# EAGLE board sensor_node_inner_layer-Panel (EAGLE 9.6.0)
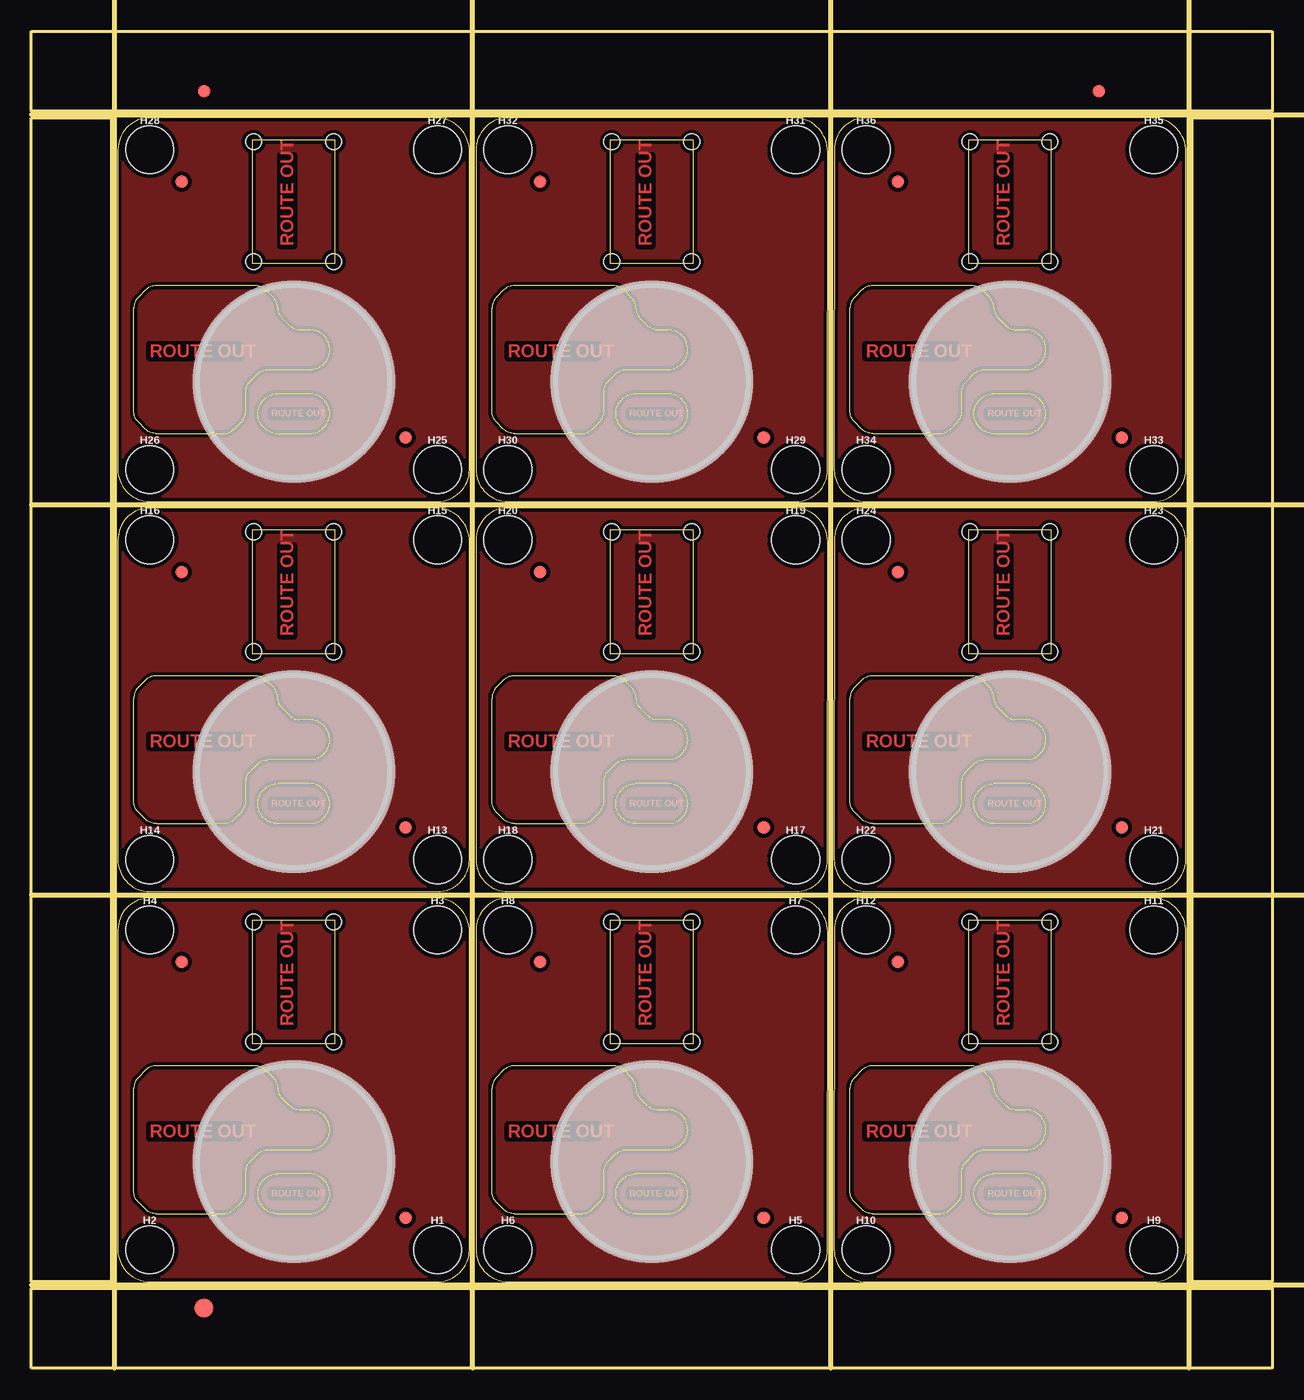
[diagram p0: board, top side]
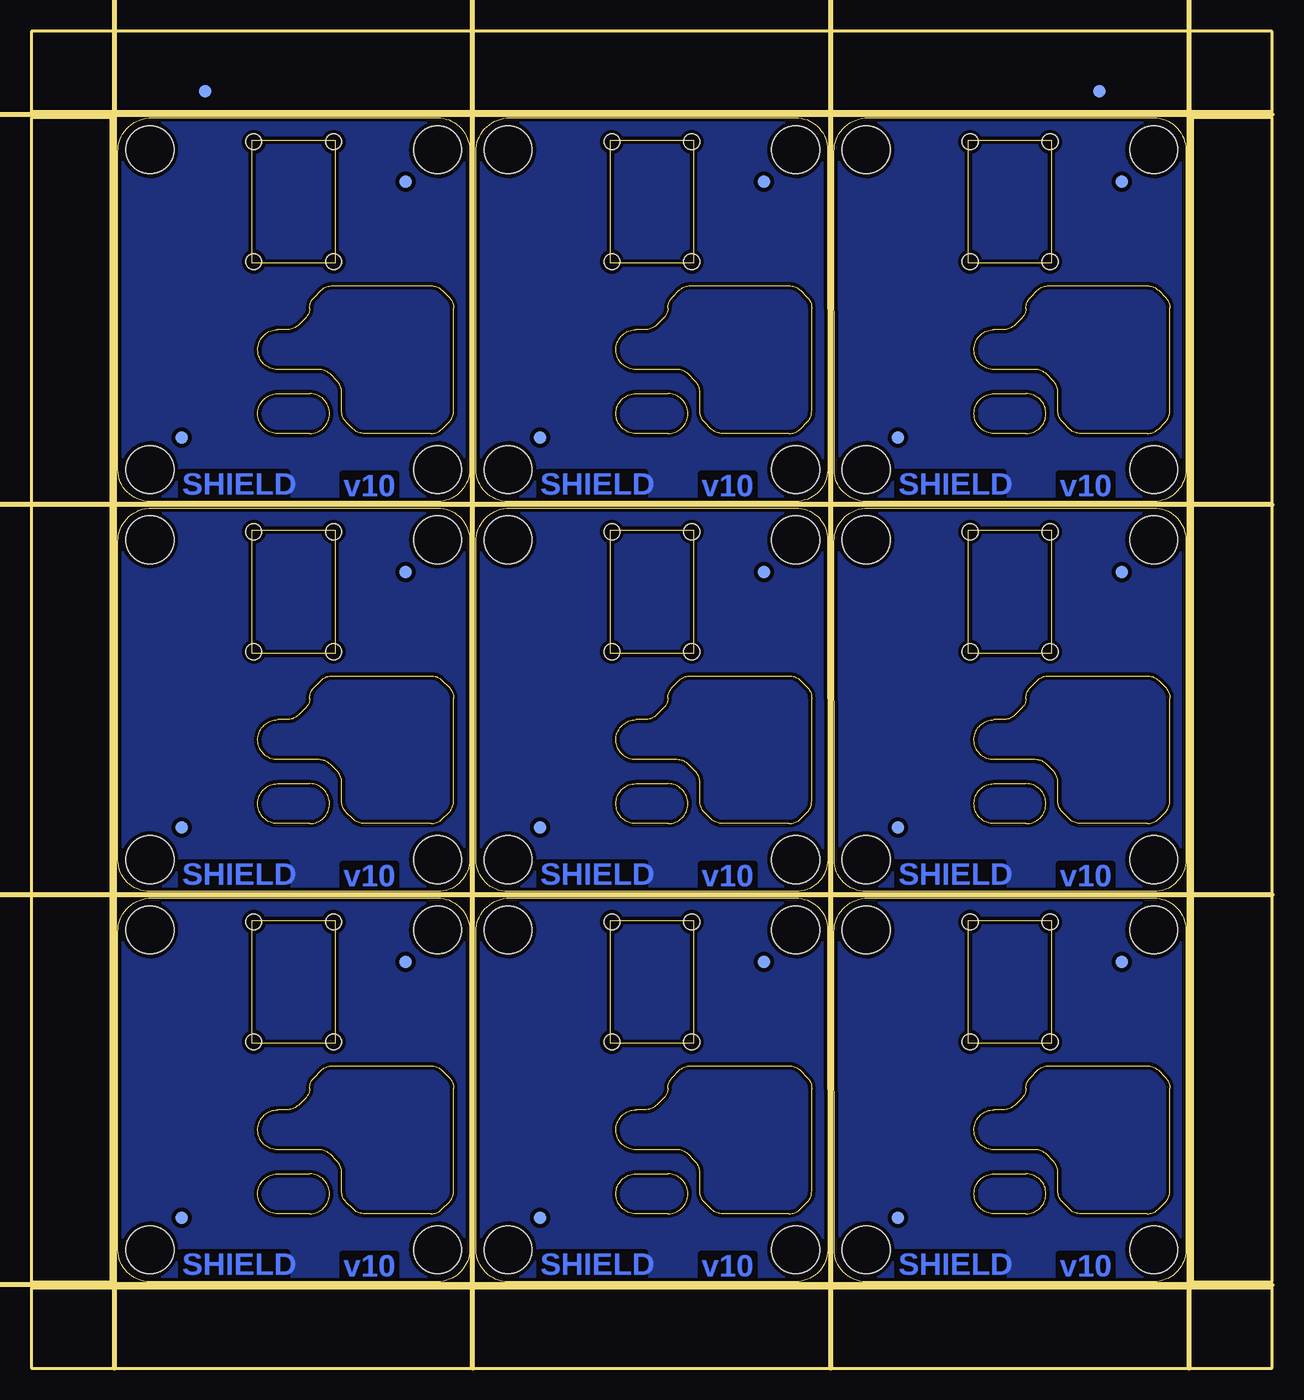
[diagram p1: board, bottom side, seen from below]

Size 98.56 x 106.17 mm. Coordinates in mm from the lower left corner, seen from the top.
Outline: 6.87,34.81 6.86,9.4 arc90 9.4,6.86 32.26,6.86 arc90 34.79,9.39 34.8,34.65 arc90 32.12,37.34 9.4,37.34 arc90 6.87,34.81
Outline: 17.53,35.56 17.53,25.78 24.13,25.78 24.13,35.56 17.53,35.56
Outline: 9.92,12.25 15.22,12.25 arc45 16.12,12.63 16.65,13.15 arc45 17.02,14.05 17.02,15.54 arc-45 17.39,16.44 17.92,16.96 arc-45 18.81,17.34 22.1,17.34 arc127 23.37,19.88 arc53 22.1,20.51 21.35,20.51 arc-45 20.46,20.88 19.86,21.48 arc-45 19.56,22.21 arc45 19.19,23.11 18.66,23.63 arc45 17.76,24 9.92,24 arc45 9.03,23.63 8.5,23.11 arc45 8.13,22.21 8.13,14.05 arc45 8.5,13.15 9.03,12.63 arc45 9.92,12.25
Outline: 22.1,15.43 19.56,15.43 arc180 19.56,12.25 22.1,12.25 arc180 22.1,15.43
Outline: 35.32,34.81 35.31,9.4 arc90 37.85,6.86 60.71,6.86 arc90 63.24,9.39 63.25,34.65 arc90 60.56,37.34 37.85,37.34 arc90 35.32,34.81
Outline: 45.98,35.56 45.98,25.78 52.58,25.78 52.58,35.56 45.98,35.56
Outline: 38.38,12.25 43.67,12.25 arc45 44.57,12.63 45.1,13.15 arc45 45.47,14.05 45.47,15.54 arc-45 45.84,16.44 46.37,16.96 arc-45 47.26,17.34 50.55,17.34 arc127 51.82,19.88 arc53 50.55,20.51 49.8,20.51 arc-45 48.91,20.88 48.31,21.48 arc-45 48.01,22.21 arc45 47.64,23.11 47.11,23.63 arc45 46.21,24 38.38,24 arc45 37.48,23.63 36.95,23.11 arc45 36.58,22.21 36.58,14.05 arc45 36.95,13.15 37.48,12.63 arc45 38.38,12.25
Outline: 50.55,15.43 48.01,15.43 arc180 48.01,12.25 50.55,12.25 arc180 50.55,15.43
Outline: 63.77,34.81 63.76,9.4 arc90 66.3,6.86 89.16,6.86 arc90 91.7,9.39 91.7,34.65 arc90 89.02,37.34 66.3,37.34 arc90 63.77,34.81
Outline: 74.43,35.56 74.43,25.78 81.03,25.78 81.03,35.56 74.43,35.56
Outline: 66.83,12.25 72.12,12.25 arc45 73.02,12.63 73.55,13.15 arc45 73.92,14.05 73.92,15.54 arc-45 74.29,16.44 74.82,16.96 arc-45 75.72,17.34 79,17.34 arc127 80.27,19.88 arc53 79,20.51 78.26,20.51 arc-45 77.36,20.88 76.76,21.48 arc-45 76.46,22.21 arc45 76.09,23.11 75.56,23.63 arc45 74.66,24 66.83,24 arc45 65.93,23.63 65.4,23.11 arc45 65.03,22.21 65.03,14.05 arc45 65.4,13.15 65.93,12.63 arc45 66.83,12.25
Outline: 79,15.43 76.46,15.43 arc180 76.46,12.25 79,12.25 arc180 79,15.43
Outline: 6.87,65.79 6.86,40.39 arc90 9.4,37.85 32.26,37.85 arc90 34.79,40.38 34.8,65.64 arc90 32.12,68.33 9.4,68.33 arc90 6.87,65.79
Outline: 17.53,66.55 17.53,56.77 24.13,56.77 24.13,66.55 17.53,66.55
Outline: 9.92,43.24 15.22,43.24 arc45 16.12,43.61 16.65,44.14 arc45 17.02,45.04 17.02,46.53 arc-45 17.39,47.42 17.92,47.95 arc-45 18.81,48.32 22.1,48.32 arc127 23.37,50.86 arc53 22.1,51.5 21.35,51.5 arc-45 20.46,51.87 19.86,52.47 arc-45 19.56,53.2 arc45 19.19,54.09 18.66,54.62 arc45 17.76,54.99 9.92,54.99 arc45 9.03,54.62 8.5,54.09 arc45 8.13,53.2 8.13,45.04 arc45 8.5,44.14 9.03,43.61 arc45 9.92,43.24
Outline: 22.1,46.42 19.56,46.42 arc180 19.56,43.24 22.1,43.24 arc180 22.1,46.42
Outline: 35.32,65.79 35.31,40.39 arc90 37.85,37.85 60.71,37.85 arc90 63.24,40.38 63.25,65.64 arc90 60.56,68.33 37.85,68.33 arc90 35.32,65.79
Outline: 45.98,66.55 45.98,56.77 52.58,56.77 52.58,66.55 45.98,66.55
Outline: 38.38,43.24 43.67,43.24 arc45 44.57,43.61 45.1,44.14 arc45 45.47,45.04 45.47,46.53 arc-45 45.84,47.42 46.37,47.95 arc-45 47.26,48.32 50.55,48.32 arc127 51.82,50.86 arc53 50.55,51.5 49.8,51.5 arc-45 48.91,51.87 48.31,52.47 arc-45 48.01,53.2 arc45 47.64,54.09 47.11,54.62 arc45 46.21,54.99 38.38,54.99 arc45 37.48,54.62 36.95,54.09 arc45 36.58,53.2 36.58,45.04 arc45 36.95,44.14 37.48,43.61 arc45 38.38,43.24
Outline: 50.55,46.42 48.01,46.42 arc180 48.01,43.24 50.55,43.24 arc180 50.55,46.42
Outline: 63.77,65.79 63.76,40.39 arc90 66.3,37.85 89.16,37.85 arc90 91.7,40.38 91.7,65.64 arc90 89.02,68.33 66.3,68.33 arc90 63.77,65.79
Outline: 74.43,66.55 74.43,56.77 81.03,56.77 81.03,66.55 74.43,66.55
Outline: 66.83,43.24 72.12,43.24 arc45 73.02,43.61 73.55,44.14 arc45 73.92,45.04 73.92,46.53 arc-45 74.29,47.42 74.82,47.95 arc-45 75.72,48.32 79,48.32 arc127 80.27,50.86 arc53 79,51.5 78.26,51.5 arc-45 77.36,51.87 76.76,52.47 arc-45 76.46,53.2 arc45 76.09,54.09 75.56,54.62 arc45 74.66,54.99 66.83,54.99 arc45 65.93,54.62 65.4,54.09 arc45 65.03,53.2 65.03,45.04 arc45 65.4,44.14 65.93,43.61 arc45 66.83,43.24
Outline: 79,46.42 76.46,46.42 arc180 76.46,43.24 79,43.24 arc180 79,46.42
Outline: 6.87,96.78 6.86,71.38 arc90 9.4,68.83 32.26,68.83 arc90 34.79,71.37 34.8,96.62 arc90 32.12,99.31 9.4,99.31 arc90 6.87,96.78
Outline: 17.53,97.54 17.53,87.76 24.13,87.76 24.13,97.54 17.53,97.54
Outline: 9.92,74.23 15.22,74.23 arc45 16.12,74.6 16.65,75.13 arc45 17.02,76.03 17.02,77.52 arc-45 17.39,78.41 17.92,78.94 arc-45 18.81,79.31 22.1,79.31 arc127 23.37,81.85 arc53 22.1,82.49 21.35,82.49 arc-45 20.46,82.86 19.86,83.45 arc-45 19.56,84.18 arc45 19.19,85.08 18.66,85.61 arc45 17.76,85.98 9.92,85.98 arc45 9.03,85.61 8.5,85.08 arc45 8.13,84.18 8.13,76.03 arc45 8.5,75.13 9.03,74.6 arc45 9.92,74.23
Outline: 22.1,77.41 19.56,77.41 arc180 19.56,74.23 22.1,74.23 arc180 22.1,77.41
Outline: 35.32,96.78 35.31,71.38 arc90 37.85,68.83 60.71,68.83 arc90 63.24,71.37 63.25,96.62 arc90 60.56,99.31 37.85,99.31 arc90 35.32,96.78
Outline: 45.98,97.54 45.98,87.76 52.58,87.76 52.58,97.54 45.98,97.54
Outline: 38.38,74.23 43.67,74.23 arc45 44.57,74.6 45.1,75.13 arc45 45.47,76.03 45.47,77.52 arc-45 45.84,78.41 46.37,78.94 arc-45 47.26,79.31 50.55,79.31 arc127 51.82,81.85 arc53 50.55,82.49 49.8,82.49 arc-45 48.91,82.86 48.31,83.45 arc-45 48.01,84.18 arc45 47.64,85.08 47.11,85.61 arc45 46.21,85.98 38.38,85.98 arc45 37.48,85.61 36.95,85.08 arc45 36.58,84.18 36.58,76.03 arc45 36.95,75.13 37.48,74.6 arc45 38.38,74.23
Outline: 50.55,77.41 48.01,77.41 arc180 48.01,74.23 50.55,74.23 arc180 50.55,77.41
Outline: 63.77,96.78 63.76,71.38 arc90 66.3,68.83 89.16,68.83 arc90 91.7,71.37 91.7,96.62 arc90 89.02,99.31 66.3,99.31 arc90 63.77,96.78
Outline: 74.43,97.54 74.43,87.76 81.03,87.76 81.03,97.54 74.43,97.54
Outline: 66.83,74.23 72.12,74.23 arc45 73.02,74.6 73.55,75.13 arc45 73.92,76.03 73.92,77.52 arc-45 74.29,78.41 74.82,78.94 arc-45 75.72,79.31 79,79.31 arc127 80.27,81.85 arc53 79,82.49 78.26,82.49 arc-45 77.36,82.86 76.76,83.45 arc-45 76.46,84.18 arc45 76.09,85.08 75.56,85.61 arc45 74.66,85.98 66.83,85.98 arc45 65.93,85.61 65.4,85.08 arc45 65.03,84.18 65.03,76.03 arc45 65.4,75.13 65.93,74.6 arc45 66.83,74.23
Outline: 79,77.41 76.46,77.41 arc180 76.46,74.23 79,74.23 arc180 79,77.41
Outline: 0,6.35 98.56,6.35 98.56,0 0,0 0,6.35
Outline: 92.21,99.31 98.56,99.31 98.56,6.86 92.21,6.86 92.21,99.31
Outline: 0,106.17 98.56,106.17 98.56,99.82 0,99.82 0,106.17
Outline: 0,99.31 6.35,99.31 6.35,6.86 0,6.86 0,99.31
Copper layers (1*16): Top 0.035mm / dielectric 1.5mm / Bottom 0.035mm
Design rules "sensor_node_inner_layer": minimum track width 6mil, minimum drill 0.3mm, track to track 6mil, track to pad 6mil, pad to pad 6mil, via to via 6mil, smd to smd 6mil, copper to edge 6mil, drill to drill 6mil, minimum pad ring 6mil, minimum via ring 6mil, stop-mask expansion 4mil, vias tented up to drill 25mil, thermal gap 10mil
Holes 1.27 mm at 17.65,35.43 24,35.43 17.65,25.91 24,25.91 46.1,35.43 52.45,35.43 46.1,25.91 52.45,25.91 74.55,35.43 80.9,35.43 74.55,25.91 80.9,25.91 17.65,66.42 24,66.42 17.65,56.9 24,56.9 46.1,66.42 52.45,66.42 46.1,56.9 52.45,56.9 74.55,66.42 80.9,66.42 74.55,56.9 80.9,56.9 17.65,97.41 24,97.41 17.65,87.88 24,87.88 46.1,97.41 52.45,97.41 46.1,87.88 52.45,87.88 74.55,97.41 80.9,97.41 74.55,87.88 80.9,87.88
Milling: 8 lines

## Footprints (pad centres in the part's own frame; a part is rotated, then mirrored left to right if it is on the bottom)
FIDUCIAL-1X2 = smd 1 x 1: 1 0,0
FIDUCIAL-1.5X3 = smd 1.5 x 1.5: 1 0,0
STAND-OFF-#8 = hole 3.81: 0,0

## Placement (x,y rotation side)
E$1  [FIDUCIAL-1X2]  13.72,101.41 0 top
E$2  [FIDUCIAL-1X2]  13.72,101.41 0 bottom
E$3  [FIDUCIAL-1X2]  84.78,101.41 0 top
E$4  [FIDUCIAL-1X2]  84.78,101.41 0 bottom
E$5  [FIDUCIAL-1.5X3]  13.72,4.76 0 top
FD1  FIDUCIAL1X2  [FIDUCIAL-1X2]  11.94,32.26 0 top
FD2  FIDUCIAL1X2  [FIDUCIAL-1X2]  29.72,11.94 0 top
FD3  FIDUCIAL1X2  [FIDUCIAL-1X2]  11.94,32.26 0 bottom
FD4  FIDUCIAL1X2  [FIDUCIAL-1X2]  29.72,11.94 0 bottom
FD5  FIDUCIAL1X2  [FIDUCIAL-1X2]  40.39,32.26 0 top
FD6  FIDUCIAL1X2  [FIDUCIAL-1X2]  58.17,11.94 0 top
FD7  FIDUCIAL1X2  [FIDUCIAL-1X2]  40.39,32.26 0 bottom
FD8  FIDUCIAL1X2  [FIDUCIAL-1X2]  58.17,11.94 0 bottom
FD9  FIDUCIAL1X2  [FIDUCIAL-1X2]  68.84,32.26 0 top
FD10  FIDUCIAL1X2  [FIDUCIAL-1X2]  86.62,11.94 0 top
FD11  FIDUCIAL1X2  [FIDUCIAL-1X2]  68.84,32.26 0 bottom
FD12  FIDUCIAL1X2  [FIDUCIAL-1X2]  86.62,11.94 0 bottom
FD13  FIDUCIAL1X2  [FIDUCIAL-1X2]  11.94,63.25 0 top
FD14  FIDUCIAL1X2  [FIDUCIAL-1X2]  29.72,42.93 0 top
FD15  FIDUCIAL1X2  [FIDUCIAL-1X2]  11.94,63.25 0 bottom
FD16  FIDUCIAL1X2  [FIDUCIAL-1X2]  29.72,42.93 0 bottom
FD17  FIDUCIAL1X2  [FIDUCIAL-1X2]  40.39,63.25 0 top
FD18  FIDUCIAL1X2  [FIDUCIAL-1X2]  58.17,42.93 0 top
FD19  FIDUCIAL1X2  [FIDUCIAL-1X2]  40.39,63.25 0 bottom
FD20  FIDUCIAL1X2  [FIDUCIAL-1X2]  58.17,42.93 0 bottom
FD21  FIDUCIAL1X2  [FIDUCIAL-1X2]  68.84,63.25 0 top
FD22  FIDUCIAL1X2  [FIDUCIAL-1X2]  86.62,42.93 0 top
FD23  FIDUCIAL1X2  [FIDUCIAL-1X2]  68.84,63.25 0 bottom
FD24  FIDUCIAL1X2  [FIDUCIAL-1X2]  86.62,42.93 0 bottom
FD25  FIDUCIAL1X2  [FIDUCIAL-1X2]  11.94,94.23 0 top
FD26  FIDUCIAL1X2  [FIDUCIAL-1X2]  29.72,73.91 0 top
FD27  FIDUCIAL1X2  [FIDUCIAL-1X2]  11.94,94.23 0 bottom
FD28  FIDUCIAL1X2  [FIDUCIAL-1X2]  29.72,73.91 0 bottom
FD29  FIDUCIAL1X2  [FIDUCIAL-1X2]  40.39,94.23 0 top
FD30  FIDUCIAL1X2  [FIDUCIAL-1X2]  58.17,73.91 0 top
FD31  FIDUCIAL1X2  [FIDUCIAL-1X2]  40.39,94.23 0 bottom
FD32  FIDUCIAL1X2  [FIDUCIAL-1X2]  58.17,73.91 0 bottom
FD33  FIDUCIAL1X2  [FIDUCIAL-1X2]  68.84,94.23 0 top
FD34  FIDUCIAL1X2  [FIDUCIAL-1X2]  86.62,73.91 0 top
FD35  FIDUCIAL1X2  [FIDUCIAL-1X2]  68.84,94.23 0 bottom
FD36  FIDUCIAL1X2  [FIDUCIAL-1X2]  86.62,73.91 0 bottom
H1  STAND-OFF  [STAND-OFF-#8]  32.26,9.4 0 top
H2  STAND-OFF  [STAND-OFF-#8]  9.4,9.4 0 top
H3  STAND-OFF  [STAND-OFF-#8]  32.26,34.8 0 top
H4  STAND-OFF  [STAND-OFF-#8]  9.4,34.8 0 top
H5  STAND-OFF  [STAND-OFF-#8]  60.71,9.4 0 top
H6  STAND-OFF  [STAND-OFF-#8]  37.85,9.4 0 top
H7  STAND-OFF  [STAND-OFF-#8]  60.71,34.8 0 top
H8  STAND-OFF  [STAND-OFF-#8]  37.85,34.8 0 top
H9  STAND-OFF  [STAND-OFF-#8]  89.16,9.4 0 top
H10  STAND-OFF  [STAND-OFF-#8]  66.3,9.4 0 top
H11  STAND-OFF  [STAND-OFF-#8]  89.16,34.8 0 top
H12  STAND-OFF  [STAND-OFF-#8]  66.3,34.8 0 top
H13  STAND-OFF  [STAND-OFF-#8]  32.26,40.39 0 top
H14  STAND-OFF  [STAND-OFF-#8]  9.4,40.39 0 top
H15  STAND-OFF  [STAND-OFF-#8]  32.26,65.79 0 top
H16  STAND-OFF  [STAND-OFF-#8]  9.4,65.79 0 top
H17  STAND-OFF  [STAND-OFF-#8]  60.71,40.39 0 top
H18  STAND-OFF  [STAND-OFF-#8]  37.85,40.39 0 top
H19  STAND-OFF  [STAND-OFF-#8]  60.71,65.79 0 top
H20  STAND-OFF  [STAND-OFF-#8]  37.85,65.79 0 top
H21  STAND-OFF  [STAND-OFF-#8]  89.16,40.39 0 top
H22  STAND-OFF  [STAND-OFF-#8]  66.3,40.39 0 top
H23  STAND-OFF  [STAND-OFF-#8]  89.16,65.79 0 top
H24  STAND-OFF  [STAND-OFF-#8]  66.3,65.79 0 top
H25  STAND-OFF  [STAND-OFF-#8]  32.26,71.37 0 top
H26  STAND-OFF  [STAND-OFF-#8]  9.4,71.37 0 top
H27  STAND-OFF  [STAND-OFF-#8]  32.26,96.77 0 top
H28  STAND-OFF  [STAND-OFF-#8]  9.4,96.77 0 top
H29  STAND-OFF  [STAND-OFF-#8]  60.71,71.37 0 top
H30  STAND-OFF  [STAND-OFF-#8]  37.85,71.37 0 top
H31  STAND-OFF  [STAND-OFF-#8]  60.71,96.77 0 top
H32  STAND-OFF  [STAND-OFF-#8]  37.85,96.77 0 top
H33  STAND-OFF  [STAND-OFF-#8]  89.16,71.37 0 top
H34  STAND-OFF  [STAND-OFF-#8]  66.3,71.37 0 top
H35  STAND-OFF  [STAND-OFF-#8]  89.16,96.77 0 top
H36  STAND-OFF  [STAND-OFF-#8]  66.3,96.77 0 top

## Library data of the parts
E$1-E$4 FD1-FD36 = SparkFun-Aesthetics
E$5 = SparkFun-Retired
H1-H36 = standoff

## Tracks (layer width: path | path; a pad name or v marks a point on that pad's centre or on a via)
GND
  pour Bottom (isolate 0.305): 32.26,6.86 9.4,6.86 arc-90 6.86,9.4 6.86,34.8 arc-90 9.4,37.34 32.26,37.34 arc-90 34.8,34.8 34.8,9.4 arc-90
  pour Top (isolate 0.305): 32.26,6.86 9.4,6.86 arc-90 6.86,9.4 6.86,34.8 arc-90 9.4,37.34 32.26,37.34 arc-90 34.8,34.8 34.8,9.4 arc-90
GND1
  pour Bottom (isolate 0.305): 60.71,6.86 37.85,6.86 arc-90 35.31,9.4 35.31,34.8 arc-90 37.85,37.34 60.71,37.34 arc-90 63.25,34.8 63.25,9.4 arc-90
  pour Top (isolate 0.305): 60.71,6.86 37.85,6.86 arc-90 35.31,9.4 35.31,34.8 arc-90 37.85,37.34 60.71,37.34 arc-90 63.25,34.8 63.25,9.4 arc-90
GND2
  pour Bottom (isolate 0.305): 89.16,6.86 66.3,6.86 arc-90 63.76,9.4 63.76,34.8 arc-90 66.3,37.34 89.16,37.34 arc-90 91.7,34.8 91.7,9.4 arc-90
  pour Top (isolate 0.305): 89.16,6.86 66.3,6.86 arc-90 63.76,9.4 63.76,34.8 arc-90 66.3,37.34 89.16,37.34 arc-90 91.7,34.8 91.7,9.4 arc-90
GND3
  pour Bottom (isolate 0.305): 32.26,37.85 9.4,37.85 arc-90 6.86,40.39 6.86,65.79 arc-90 9.4,68.33 32.26,68.33 arc-90 34.8,65.79 34.8,40.39 arc-90
  pour Top (isolate 0.305): 32.26,37.85 9.4,37.85 arc-90 6.86,40.39 6.86,65.79 arc-90 9.4,68.33 32.26,68.33 arc-90 34.8,65.79 34.8,40.39 arc-90
GND4
  pour Bottom (isolate 0.305): 60.71,37.85 37.85,37.85 arc-90 35.31,40.39 35.31,65.79 arc-90 37.85,68.33 60.71,68.33 arc-90 63.25,65.79 63.25,40.39 arc-90
  pour Top (isolate 0.305): 60.71,37.85 37.85,37.85 arc-90 35.31,40.39 35.31,65.79 arc-90 37.85,68.33 60.71,68.33 arc-90 63.25,65.79 63.25,40.39 arc-90
GND5
  pour Bottom (isolate 0.305): 89.16,37.85 66.3,37.85 arc-90 63.76,40.39 63.76,65.79 arc-90 66.3,68.33 89.16,68.33 arc-90 91.7,65.79 91.7,40.39 arc-90
  pour Top (isolate 0.305): 89.16,37.85 66.3,37.85 arc-90 63.76,40.39 63.76,65.79 arc-90 66.3,68.33 89.16,68.33 arc-90 91.7,65.79 91.7,40.39 arc-90
GND6
  pour Bottom (isolate 0.305): 32.26,68.83 9.4,68.83 arc-90 6.86,71.37 6.86,96.77 arc-90 9.4,99.31 32.26,99.31 arc-90 34.8,96.77 34.8,71.37 arc-90
  pour Top (isolate 0.305): 32.26,68.83 9.4,68.83 arc-90 6.86,71.37 6.86,96.77 arc-90 9.4,99.31 32.26,99.31 arc-90 34.8,96.77 34.8,71.37 arc-90
GND7
  pour Bottom (isolate 0.305): 60.71,68.83 37.85,68.83 arc-90 35.31,71.37 35.31,96.77 arc-90 37.85,99.31 60.71,99.31 arc-90 63.25,96.77 63.25,71.37 arc-90
  pour Top (isolate 0.305): 60.71,68.83 37.85,68.83 arc-90 35.31,71.37 35.31,96.77 arc-90 37.85,99.31 60.71,99.31 arc-90 63.25,96.77 63.25,71.37 arc-90
GND8
  pour Bottom (isolate 0.305): 89.16,68.83 66.3,68.83 arc-90 63.76,71.37 63.76,96.77 arc-90 66.3,99.31 89.16,99.31 arc-90 91.7,96.77 91.7,71.37 arc-90
  pour Top (isolate 0.305): 89.16,68.83 66.3,68.83 arc-90 63.76,71.37 63.76,96.77 arc-90 66.3,99.31 89.16,99.31 arc-90 91.7,96.77 91.7,71.37 arc-90

## Text on the board
Top: ROUTE OUT | ROUTE OUT | ROUTE OUT | ROUTE OUT | ROUTE OUT | ROUTE OUT | ROUTE OUT | ROUTE OUT | ROUTE OUT | ROUTE OUT | ROUTE OUT | ROUTE OUT | ROUTE OUT | ROUTE OUT | ROUTE OUT | ROUTE OUT | ROUTE OUT | ROUTE OUT | ROUTE OUT | ROUTE OUT | ROUTE OUT | ROUTE OUT | ROUTE OUT | ROUTE OUT | ROUTE OUT | ROUTE OUT | ROUTE OUT
Bottom: v10 | SHIELD | v10 | SHIELD | v10 | SHIELD | v10 | SHIELD | v10 | SHIELD | v10 | SHIELD | SHIELD | SHIELD | SHIELD | v10 | v10 | v10
Milling: v-score | v-score | v-score | v-score | v-score | v-score | v-score | v-score